# EAGLE board ControlC (EAGLE 7.6.0)
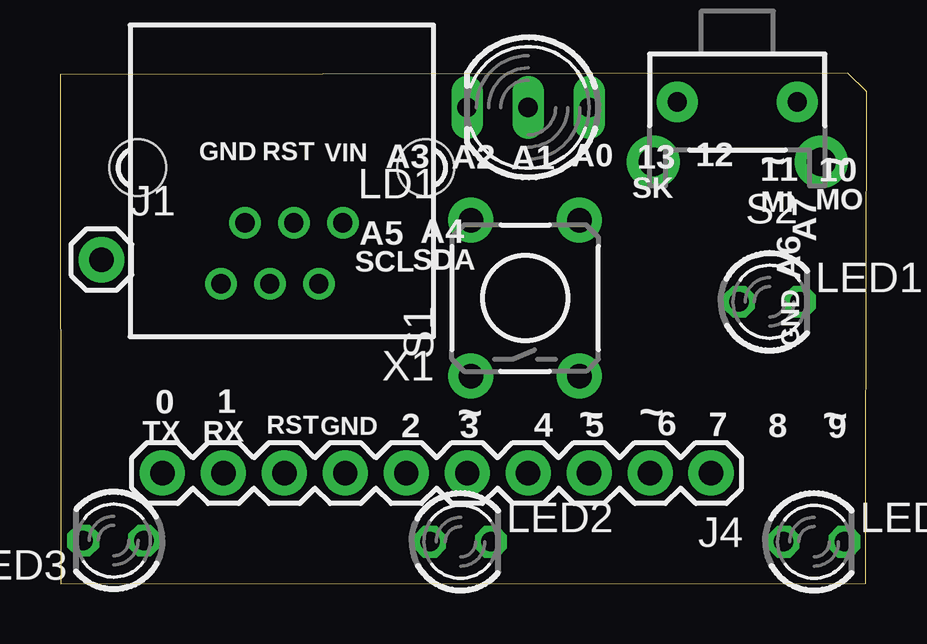
[diagram p0: board, top side]
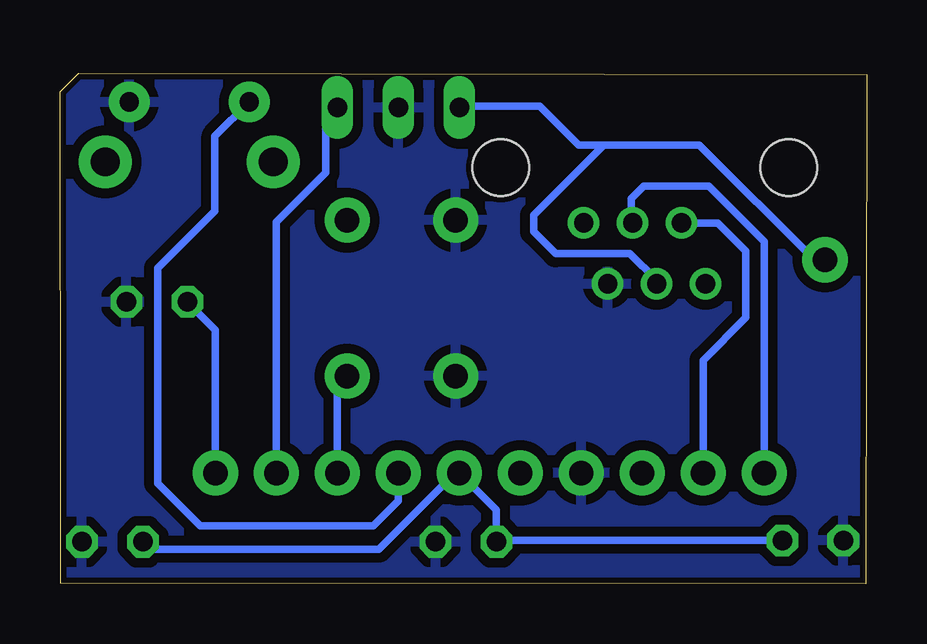
[diagram p1: board, bottom side, seen from below]

Size 33.6 x 21.29 mm. Coordinates in mm from the lower left corner, seen from the top.
Outline: 0.03,0 33.58,0.03 33.58,3.94 33.6,20.52 32.82,21.29 0,21.23 0.03,0
Copper layers (1*16): Top 0.035mm / dielectric 1.5mm / Bottom 0.035mm
Design rules "ITEADstudio_DRC *": minimum track width 6mil, minimum drill 12mil, track to track 16mil, track to pad 12mil, pad to pad 6mil, via to via 6mil, smd to smd 0mil, copper to edge 10mil, drill to drill 10mil, minimum pad ring 10mil, minimum via ring 6mil, stop-mask expansion 2mil, vias tented up to drill 100mil, thermal gap 15mil
Net classes: 1 power: width 0.381 mm, clearance 0.254 mm

## Footprints (pad centres in the part's own frame; a part is rotated, then mirrored left to right if it is on the bottom)
1X01 = drill 1.016 pad 1.88: 1 0,0
1X10 = drill 1.016 pad 1.88: 1 0,0; 2 2.54,0; 3 5.08,0; 4 7.62,0; 5 10.16,0; 6 12.7,0; 7 15.24,0; 8 17.78,0; 9 20.32,0; 10 22.86,0
DUOLED-A-5MM = drill 0.813 long: A 0,0; CR 2.54,0; CX -2.54,0
LED3MM = drill 0.813 octagon: A -1.27,0; K 1.27,0
TACTILE-PTH = drill 1.016 pad 1.88: 1 -3.251,2.261; 2 3.251,2.261; 3 -3.251,-2.261; 4 3.251,-2.261
TACTILE-PTH-SIDEEZ = drill 0.8 pad 1.7: 1 -2.5,0; 2 2.5,0 | drill 1.2 pad 2.2: ANCHOR1 -3.5,2.5; ANCHOR2 3.5,2.5
YH-55-10 = drill 0.8 pad 1.3: 1 -2.54,2.3; 2 -1.54,4.84; 3 -0.5,2.3; 4 0.5,4.84; 5 1.54,2.3; 6 2.54,4.84 | hole 2.36: -6,0; 6,0

## Placement (x,y rotation side)
J1  [1X01]  1.73,13.51 0 top
J4  [1X10]  27.13,4.62 180 top
LD1  [DUOLED-A-5MM]  19.51,19.86 180 top
LED1  [LED3MM]  29.57,11.76 0 top
LED2  [LED3MM]  16.69,1.75 0 top
LED3  [LED3MM]  2.24,1.8 180 top
LED4  [LED3MM]  31.42,1.75 0 top
S1  [TACTILE-PTH]  19.38,11.91 90 top
S2  SWITCH-MOMENTARY-2SIDE_EZ  [TACTILE-PTH-SIDEEZ]  28.22,20.09 180 top
X1  YH-55-10  [YH-55-10]  9.25,17.35 180 top

## Library data of the parts
J1 = SparkFun-Connectors
J4 = SparkFun-Connectors; PROD_ID: CONN-11563
LD1 LED1-LED4 = led
S1 = SparkFun-Retired
S2 = SparkFun-Electromechanical
X1 = con-wenzhou-yihua; OC_FARNELL: unknown; OC_NEWARK: unknown

## Nets
AGND [power]: J4.7 LD1.A LED1.K LED2.K LED3.K LED4.K S1.1 S1.2 S2.1
GND [power]: X1.2
N$1: J4.4 S2.2
N$2: J4.2 LD1.CX
N$3: J4.3 S1.3
N$4: J1.1 LD1.CR X1.4
N$5: J4.5 LED2.A LED3.A LED4.A
N$6: J4.9 X1.5
N$8: J4.1 LED1.A
VIN: J4.10 X1.3

## Tracks (layer width: path | path; a pad name or v marks a point on that pad's centre or on a via)
AGND
  pour Bottom: 0.28,21.03 33.5,21.13 33.45,0.23 0.18,0.2 0.18,20.78
GND
  pour Bottom: 0.23,21.03 33.5,21.08 33.45,0.23 0.18,0.18
N$1
  Bottom 0.305: J4.4 19.51,3.45 20.55,2.41 27.76,2.41 29.54,4.19 29.54,13.16 27.15,15.54 27.15,18.66 S2.2
N$2
  Bottom 0.305: LD1.CX 22.53,19.38 22.53,17.14 24.59,15.09 J4.2
N$3
  Bottom 0.305: J4.3 22.05,8.26 S1.3
N$4
  Bottom 0.305: J1.1 2.18,13.51 6.96,18.29 10.95,18.29 | 10.95,18.29 11.99,18.29 13.61,19.91 16.92,19.91 LD1.CR | X1.4 8.75,12.66 9.86,13.77 12.95,13.77 13.87,14.68 13.87,15.37 10.95,18.29
N$5
  Bottom 0.305: LED4.A 29.85,1.45 20.32,1.45 17.15,4.62 J4.5 15.42,3.07 LED2.A 15.37,1.8 LED3.A
N$6
  Bottom 0.305: J4.9 6.81,9.32 5.03,11.1 5.03,13.87 6.2,15.04 7.69,15.04 X1.5
N$8
  Bottom 0.305: LED1.A 27.13,10.59 J4.1
VIN
  Bottom 0.305: J4.10 4.27,14.28 6.58,16.59 9.27,16.59 9.8,16.05 9.8,15.11 X1.3

## Text on the board
_tsilk: GND | RST | VIN | A3 | A2 | A1 | 13 | 12 | 11 | ~ | 10 | A0 | ~ | SK | A7 | MO | A5 | A4 | MI | A6 | SCL | SDA | GND | 0 | 1 | TX | RX | 2 | ~ | 3 | 4 | 5 | ~ | 6 | 7 | 8 | 9 | RST | GND | ~ | ~